# EAGLE board Comms_Cape (EAGLE 7.7.0)
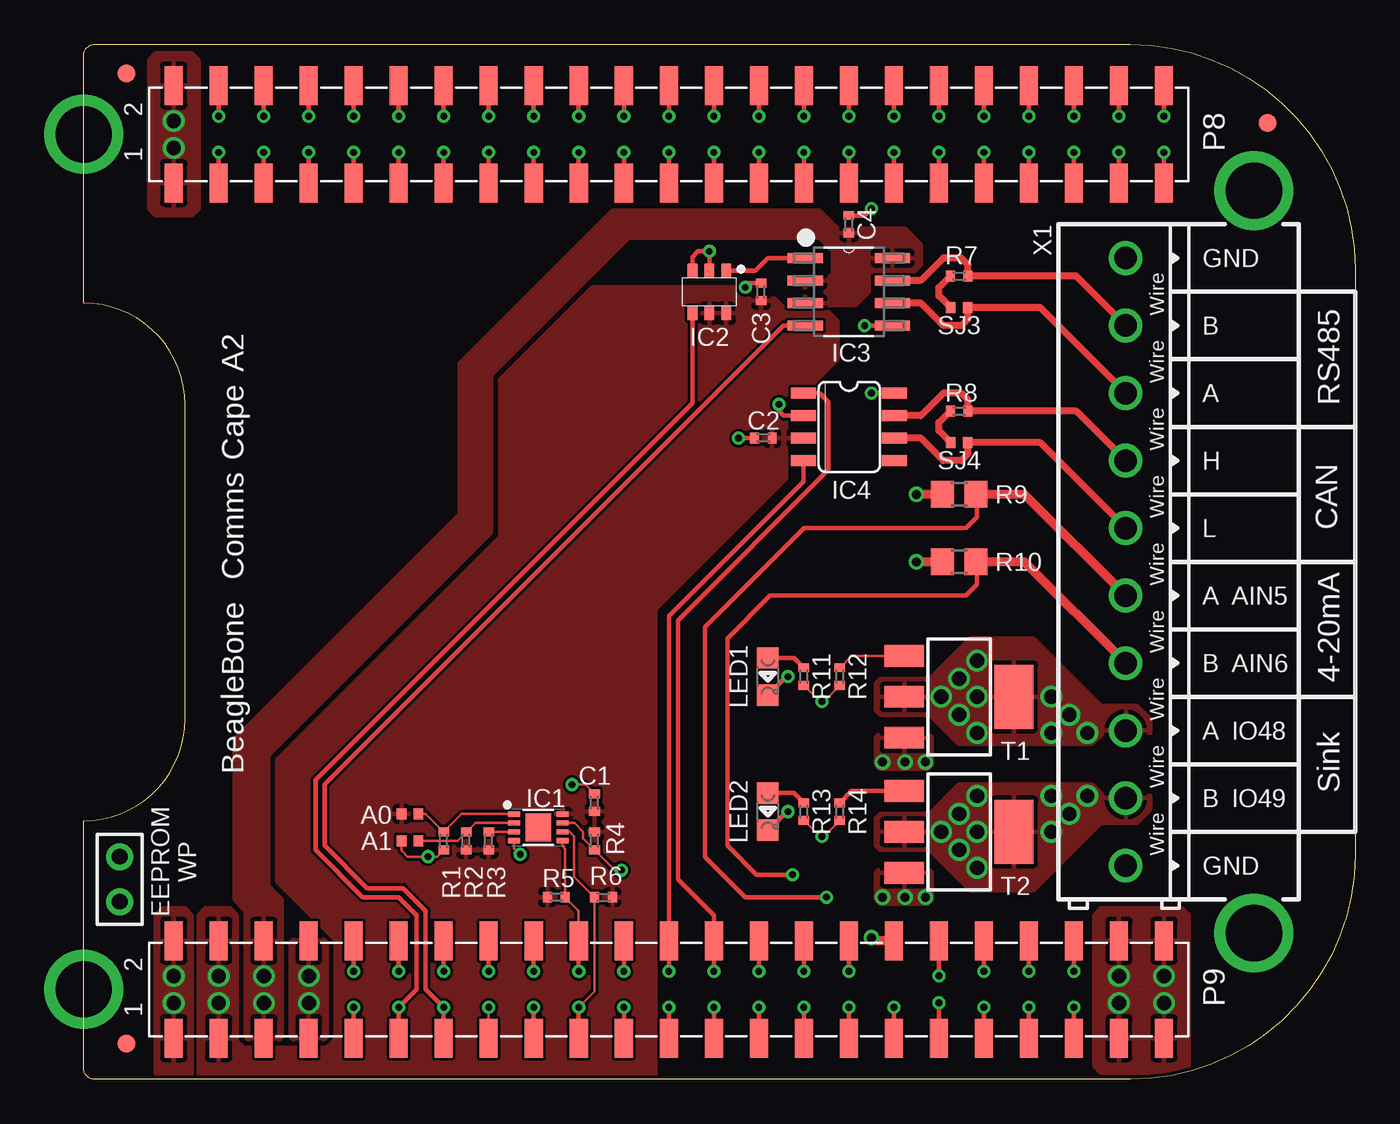
[diagram p0: board, top side]
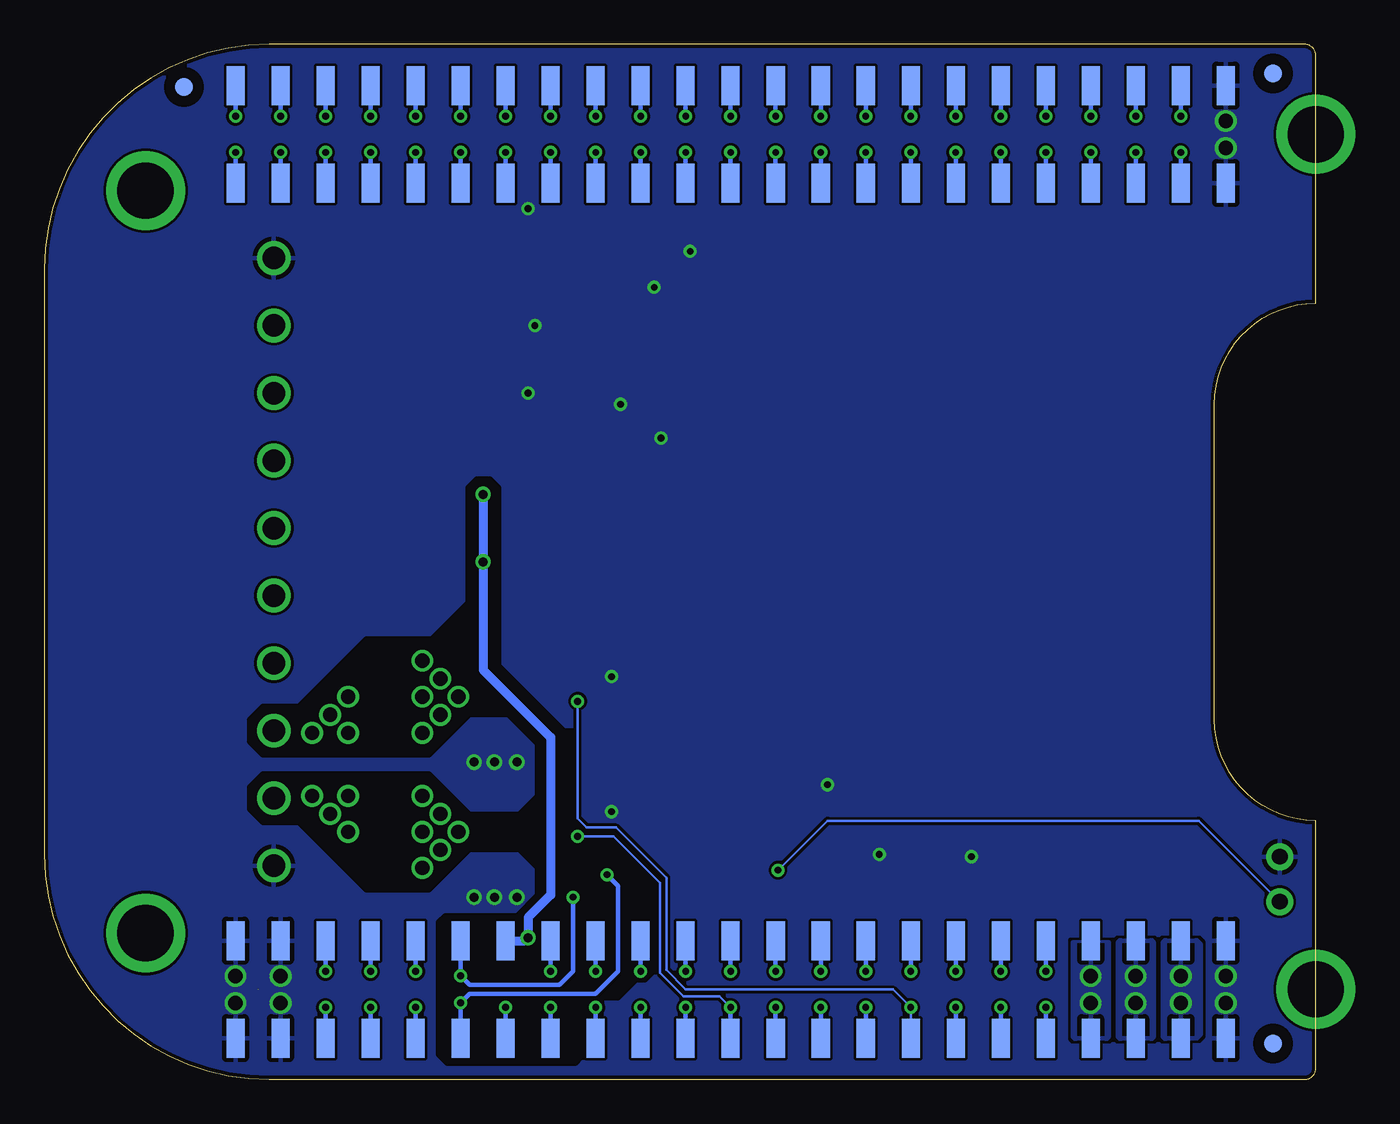
[diagram p1: board, bottom side, seen from below]

Size 71.75 x 58.42 mm. Coordinates in mm from the lower left corner, seen from the top.
Copper layers (1+16): Top 0.035mm / dielectric 1.5mm / Bottom 0.035mm
Design rules "SparkFun-2-layer *": minimum track width 6mil, minimum drill 15mil, track to track 6mil, track to pad 6mil, pad to pad 6mil, via to via 6mil, smd to smd 6mil, copper to edge 8mil, drill to drill 8mil, minimum pad ring 12mil, minimum via ring 7mil, stop-mask expansion 4mil, vias tented up to drill 32mil, thermal gap 10mil
tRestrict: area 40.5,44.3 to 40.9,44.6
bRestrict: 52 lines

## Footprints (pad centres in the part's own frame; a part is rotated, then mirrored left to right if it is on the bottom)
BEAGLEBONE.CAPE.TOP/BOTTOM-PADS = smd 1.02 x 2.2 bottom: B8.1 5.08,50.59; B8.2 5.08,56.09; B8.3 7.62,50.59; B8.4 7.62,56.09; B8.5 10.16,50.59; B8.6 10.16,56.09; B8.7 12.7,50.59; B8.8 12.7,56.09; B8.9 15.24,50.59; B8.10 15.24,56.09; B8.11 17.78,50.59; B8.12 17.78,56.09; B8.13 20.32,50.59; B8.14 20.32,56.09; B8.15 22.86,50.59; B8.16 22.86,56.09; B8.17 25.4,50.59; B8.18 25.4,56.09; B8.19 27.94,50.59; B8.20 27.94,56.09; B8.21 30.48,50.59; B8.22 30.48,56.09; B8.23 33.02,50.59; B8.24 33.02,56.09; B8.25 35.56,50.59; B8.26 35.56,56.09; B8.27 38.1,50.59; B8.28 38.1,56.09; B8.29 40.64,50.59; B8.30 40.64,56.09; B8.31 43.18,50.59; B8.32 43.18,56.09; B8.33 45.72,50.59; B8.34 45.72,56.09; B8.35 48.26,50.59; B8.36 48.26,56.09; B8.37 50.8,50.59; B8.38 50.8,56.09; B8.39 53.34,50.59; B8.40 53.34,56.09; B8.41 55.88,50.59; B8.42 55.88,56.09; B8.43 58.42,50.59; B8.44 58.42,56.09; B8.45 60.96,50.59; B8.46 60.96,56.09; B9.1 5.08,2.33; B9.2 5.08,7.83; B9.3 7.62,2.33; B9.4 7.62,7.83; B9.5 10.16,2.33; B9.6 10.16,7.83; B9.7 12.7,2.33; B9.8 12.7,7.83; B9.9 15.24,2.33; B9.10 15.24,7.83; B9.11 17.78,2.33; B9.12 17.78,7.83; B9.13 20.32,2.33; B9.14 20.32,7.83; B9.15 22.86,2.33; B9.16 22.86,7.83; B9.17 25.4,2.33; B9.18 25.4,7.83; B9.19 27.94,2.33; B9.20 27.94,7.83; B9.21 30.48,2.33; B9.22 30.48,7.83; B9.23 33.02,2.33; B9.24 33.02,7.83; B9.25 35.56,2.33; B9.26 35.56,7.83; B9.27 38.1,2.33; B9.28 38.1,7.83; B9.29 40.64,2.33; B9.30 40.64,7.83; B9.31 43.18,2.33; B9.32 43.18,7.83; B9.33 45.72,2.33; B9.34 45.72,7.83; B9.35 48.26,2.33; B9.36 48.26,7.83; B9.37 50.8,2.33; B9.38 50.8,7.83; B9.39 53.34,2.33; B9.40 53.34,7.83; B9.41 55.88,2.33; B9.42 55.88,7.83; B9.43 58.42,2.33; B9.44 58.42,7.83; B9.45 60.96,2.33; B9.46 60.96,7.83 | drill 3.175 pad 4.445: MH.1 0,5.08; MH.2 66.04,8.255; MH.3 66.04,50.165; MH.4 0,53.34 | smd 1.02 x 2.2: T8.1 5.08,50.59; T8.2 5.08,56.09; T8.3 7.62,50.59; T8.4 7.62,56.09; T8.5 10.16,50.59; T8.6 10.16,56.09; T8.7 12.7,50.59; T8.8 12.7,56.09; T8.9 15.24,50.59; T8.10 15.24,56.09; T8.11 17.78,50.59; T8.12 17.78,56.09; T8.13 20.32,50.59; T8.14 20.32,56.09; T8.15 22.86,50.59; T8.16 22.86,56.09; T8.17 25.4,50.59; T8.18 25.4,56.09; T8.19 27.94,50.59; T8.20 27.94,56.09; T8.21 30.48,50.59; T8.22 30.48,56.09; T8.23 33.02,50.59; T8.24 33.02,56.09; T8.25 35.56,50.59; T8.26 35.56,56.09; T8.27 38.1,50.59; T8.28 38.1,56.09; T8.29 40.64,50.59; T8.30 40.64,56.09; T8.31 43.18,50.59; T8.32 43.18,56.09; T8.33 45.72,50.59; T8.34 45.72,56.09; T8.35 48.26,50.59; T8.36 48.26,56.09; T8.37 50.8,50.59; T8.38 50.8,56.09; T8.39 53.34,50.59; T8.40 53.34,56.09; T8.41 55.88,50.59; T8.42 55.88,56.09; T8.43 58.42,50.59; T8.44 58.42,56.09; T8.45 60.96,50.59; T8.46 60.96,56.09; T9.1 5.08,2.33; T9.2 5.08,7.83; T9.3 7.62,2.33; T9.4 7.62,7.83; T9.5 10.16,2.33; T9.6 10.16,7.83; T9.7 12.7,2.33; T9.8 12.7,7.83; T9.9 15.24,2.33; T9.10 15.24,7.83; T9.11 17.78,2.33; T9.12 17.78,7.83; T9.13 20.32,2.33; T9.14 20.32,7.83; T9.15 22.86,2.33; T9.16 22.86,7.83; T9.17 25.4,2.33; T9.18 25.4,7.83; T9.19 27.94,2.33; T9.20 27.94,7.83; T9.21 30.48,2.33; T9.22 30.48,7.83; T9.23 33.02,2.33; T9.24 33.02,7.83; T9.25 35.56,2.33; T9.26 35.56,7.83; T9.27 38.1,2.33; T9.28 38.1,7.83; T9.29 40.64,2.33; T9.30 40.64,7.83; T9.31 43.18,2.33; T9.32 43.18,7.83; T9.33 45.72,2.33; T9.34 45.72,7.83; T9.35 48.26,2.33; T9.36 48.26,7.83; T9.37 50.8,2.33; T9.38 50.8,7.83; T9.39 53.34,2.33; T9.40 53.34,7.83; T9.41 55.88,2.33; T9.42 55.88,7.83; T9.43 58.42,2.33; T9.44 58.42,7.83; T9.45 60.96,2.33; T9.46 60.96,7.83
0402 = smd 0.5 x 0.6: 1 -0.5,0; 2 0.5,0
FIDUCIAL_40MIL = smd 1.016 x 1.016: P$1 0,0
UDFN8,2X3(ON-SEMI) = smd 0.3 x 0.68: 1 0.75,1.36; 2 0.25,1.36; 3 -0.25,1.36; 4 -0.75,1.36; 5 -0.75,-1.36; 6 -0.25,-1.36; 7 0.25,-1.36; 8 0.75,-1.36 | smd 1.56 x 1.45: P$1 0,0
SOT-23-6 = smd 0.55 x 0.8: GND 0,-1.2; IN0 0.95,-1.2; IN1 -0.95,-1.2; IN2 -0.95,1.2; VCC 0,1.2; Y 0.95,1.2
SOIC8 = smd 1.981 x 0.559: 1 -2.464,1.905; 2 -2.464,0.635; 3 -2.464,-0.635; 4 -2.464,-1.905; 5 2.464,-1.905; 6 2.464,-0.635; 7 2.464,0.635; 8 2.464,1.905
SO8 = smd 0.635 x 1.397: 1 -1.905,-2.565; 2 -0.635,-2.565; 3 0.635,-2.565; 4 1.905,-2.565; 5 1.905,2.565; 6 0.635,2.565; 7 -0.635,2.565; 8 -1.905,2.565
JUMPER-(X2) = drill 0.889 pad 1.524: 1 -1.27,0; 2 1.27,0
0805-LED = smd 1.2 x 1.2: A 0,1.05; K 0,-1.05
0805 = smd 1.3 x 1.5: 1 -0.95,0; 2 0.95,0
SOLDER.JOINT(0402) = smd 0.55 x 0.6: 1 -0.475,0; 2 0.475,0
SOT223 = smd 1.219 x 2.235: 1 -2.311,-3.099; 2 0,-3.099; 3 2.311,-3.099 | smd 3.6 x 2.2: 4 0,3.099
TERMINAL.BLOCK-10TERM-150MIL.PITCH = drill 1.27 pad 1.905: 1 -17.145,0; 2 -13.335,0; 3 -9.525,0; 4 -5.715,0; 5 -1.905,0; 6 1.905,0; 7 5.715,0; 8 9.525,0; 9 13.335,0; 10 17.145,0

## Placement (x,y rotation side)
BB.CAPE2  BEAGLEBONE.CAPE.TOP/BOTTOM-PADS  [BEAGLEBONE.CAPE.TOP/BOTTOM-PADS]  0,0 0 top
C1  .1uF  [0402]  28.83,15.62 90 top
C2  .1uF  [0402]  38.35,36.2 180 top
C3  .1uF  [0402]  38.23,44.45 90 top
C4  .1uF  [0402]  43.18,48.26 90 top
FUD1  FIDUCIAL  [FIDUCIAL_40MIL]  2.41,2.03 0 top
FUD2  FIDUCIAL  [FIDUCIAL_40MIL]  66.8,53.98 0 top
FUD3  FIDUCIAL  [FIDUCIAL_40MIL]  2.41,56.77 0 top
FUD4  FIDUCIAL  [FIDUCIAL_40MIL]  2.41,2.03 0 bottom
FUD5  FIDUCIAL  [FIDUCIAL_40MIL]  63.88,56.01 0 bottom
FUD6  FIDUCIAL  [FIDUCIAL_40MIL]  2.41,56.77 0 bottom
IC1  [UDFN8,2X3(ON-SEMI)]  25.65,14.22 90 top
IC2  74LVC1G57  [SOT-23-6]  35.31,44.45 180 top
IC3  MAX13487EESA  [SOIC8]  43.18,44.45 0 top
IC4  SN65HVD230  [SO8]  43.18,36.83 270 top
JMP1  JUMPER-(X2)  [JUMPER-(X2)]  2.03,11.3 90 top
LED1  [0805-LED]  38.61,22.73 0 top
LED2  [0805-LED]  38.61,15.11 0 top
R1  1k  [0402]  20.32,13.46 90 top
R2  1k  [0402]  21.59,13.46 90 top
R3  1k  [0402]  22.86,13.46 90 top
R4  1k  [0402]  28.83,13.46 90 top
R5  DNP(2.2k)  [0402]  26.67,10.29 180 top
R6  DNP(2.2k)  [0402]  29.34,10.29 0 top
R7  120  [0402]  49.4,45.34 0 top
R8  120  [0402]  49.4,37.72 0 top
R9  75 .125W  [0805]  49.4,33.02 0 top
R10  75 .125W  [0805]  49.4,29.21 0 top
R11  1k  [0402]  40.64,22.73 90 top
R12  330  [0402]  42.67,22.73 90 top
R13  1k  [0402]  40.64,15.11 90 top
R14  330  [0402]  42.67,15.11 90 top
SJ1  [SOLDER.JOINT(0402)]  18.41,14.99 0 top
SJ2  [SOLDER.JOINT(0402)]  18.41,13.46 0 top
SJ3  [SOLDER.JOINT(0402)]  49.4,43.56 0 top
SJ4  [SOLDER.JOINT(0402)]  49.4,35.94 0 top
T1  PBSS4350Z 50V 3A  [SOT223]  49.4,21.59 270 top
T2  PBSS4350Z 50V 3A  [SOT223]  49.4,13.97 270 top
X1  [TERMINAL.BLOCK-10TERM-150MIL.PITCH]  58.8,29.21 270 top

## Library data of the parts
BB.CAPE2 = GHI-Solutions
C1-C4 LED1 LED2 R1-R14 = GHI-BasicComponents
FUD1-FUD6 IC4 = GHI
IC1 = GHI-IC
IC2 = GHI2
IC3 = GHI3
JMP1 = GHI-Headers
SJ1-SJ4 = GHI-Miscellaneous
T1 T2 = GHI-Transistors
X1 = GHI-Connectors

## Nets
4-20MA.LOOP.A: BB.CAPE2.B9.36 BB.CAPE2.T9.36 R9.2 X1.6
4-20MA.LOOP.B: BB.CAPE2.B9.35 BB.CAPE2.T9.35 R10.2 X1.7
+5V [power]: BB.CAPE2.B9.5 BB.CAPE2.B9.6 BB.CAPE2.T9.5 BB.CAPE2.T9.6 C4.1 IC3.2 IC3.3 IC3.8
A0: IC1.1 R1.2 SJ1.2
A1: IC1.2 R2.2 SJ2.2
A2: IC1.3 R3.2
AGND: BB.CAPE2.B9.34 BB.CAPE2.T9.34 R9.1 R10.1
CAN.H: IC4.7 R8.2 X1.4
CAN.L: IC4.6 SJ4.2 X1.5
CAN.RD: BB.CAPE2.B9.24 BB.CAPE2.T9.24 IC4.4
CAN.TD: BB.CAPE2.B9.26 BB.CAPE2.T9.26 IC4.1
GND: BB.CAPE2.B8.1 BB.CAPE2.B8.2 BB.CAPE2.B9.1 BB.CAPE2.B9.2 BB.CAPE2.B9.43 BB.CAPE2.B9.44 BB.CAPE2.B9.45 BB.CAPE2.B9.46 BB.CAPE2.T8.1 BB.CAPE2.T8.2 BB.CAPE2.T9.1 BB.CAPE2.T9.2 BB.CAPE2.T9.43 BB.CAPE2.T9.44 BB.CAPE2.T9.45 BB.CAPE2.T9.46 C1.2 C2.2 C3.2 C4.2 IC1.4 IC2.GND IC2.IN0 IC3.5 IC4.2 IC4.8 JMP1.2 LED1.K LED2.K R1.1 SJ2.1 T1.3 T2.3 X1.1 X1.10
N$4: R8.1 SJ4.1
N$5: R7.1 SJ3.1
N$7: LED1.A R11.2
N$8: LED2.A R13.2
P8.3: BB.CAPE2.B8.3 BB.CAPE2.T8.3
P8.4: BB.CAPE2.B8.4 BB.CAPE2.T8.4
P8.5: BB.CAPE2.B8.5 BB.CAPE2.T8.5
P8.6: BB.CAPE2.B8.6 BB.CAPE2.T8.6
P8.7: BB.CAPE2.B8.7 BB.CAPE2.T8.7
P8.8: BB.CAPE2.B8.8 BB.CAPE2.T8.8
P8.9: BB.CAPE2.B8.9 BB.CAPE2.T8.9
P8.10: BB.CAPE2.B8.10 BB.CAPE2.T8.10
P8.11: BB.CAPE2.B8.11 BB.CAPE2.T8.11
P8.12: BB.CAPE2.B8.12 BB.CAPE2.T8.12
P8.13: BB.CAPE2.B8.13 BB.CAPE2.T8.13
P8.14: BB.CAPE2.B8.14 BB.CAPE2.T8.14
P8.15: BB.CAPE2.B8.15 BB.CAPE2.T8.15
P8.16: BB.CAPE2.B8.16 BB.CAPE2.T8.16
P8.17: BB.CAPE2.B8.17 BB.CAPE2.T8.17
P8.18: BB.CAPE2.B8.18 BB.CAPE2.T8.18
P8.19: BB.CAPE2.B8.19 BB.CAPE2.T8.19
P8.20: BB.CAPE2.B8.20 BB.CAPE2.T8.20
P8.21: BB.CAPE2.B8.21 BB.CAPE2.T8.21
P8.22: BB.CAPE2.B8.22 BB.CAPE2.T8.22
P8.23: BB.CAPE2.B8.23 BB.CAPE2.T8.23
P8.24: BB.CAPE2.B8.24 BB.CAPE2.T8.24
P8.25: BB.CAPE2.B8.25 BB.CAPE2.T8.25
P8.26: BB.CAPE2.B8.26 BB.CAPE2.T8.26
P8.27: BB.CAPE2.B8.27 BB.CAPE2.T8.27
P8.28: BB.CAPE2.B8.28 BB.CAPE2.T8.28
P8.29: BB.CAPE2.B8.29 BB.CAPE2.T8.29
P8.30: BB.CAPE2.B8.30 BB.CAPE2.T8.30
P8.31: BB.CAPE2.B8.31 BB.CAPE2.T8.31
P8.32: BB.CAPE2.B8.32 BB.CAPE2.T8.32
P8.33: BB.CAPE2.B8.33 BB.CAPE2.T8.33
P8.34: BB.CAPE2.B8.34 BB.CAPE2.T8.34
P8.35: BB.CAPE2.B8.35 BB.CAPE2.T8.35
P8.36: BB.CAPE2.B8.36 BB.CAPE2.T8.36
P8.37: BB.CAPE2.B8.37 BB.CAPE2.T8.37
P8.38: BB.CAPE2.B8.38 BB.CAPE2.T8.38
P8.39: BB.CAPE2.B8.39 BB.CAPE2.T8.39
P8.40: BB.CAPE2.B8.40 BB.CAPE2.T8.40
P8.41: BB.CAPE2.B8.41 BB.CAPE2.T8.41
P8.42: BB.CAPE2.B8.42 BB.CAPE2.T8.42
P8.43: BB.CAPE2.B8.43 BB.CAPE2.T8.43
P8.44: BB.CAPE2.B8.44 BB.CAPE2.T8.44
P8.45: BB.CAPE2.B8.45 BB.CAPE2.T8.45
P8.46: BB.CAPE2.B8.46 BB.CAPE2.T8.46
P9.9: BB.CAPE2.B9.9 BB.CAPE2.T9.9
P9.10: BB.CAPE2.B9.10 BB.CAPE2.T9.10
P9.12: BB.CAPE2.B9.12 BB.CAPE2.T9.12
P9.14: BB.CAPE2.B9.14 BB.CAPE2.T9.14
P9.16: BB.CAPE2.B9.16 BB.CAPE2.T9.16
P9.17: BB.CAPE2.B9.17 BB.CAPE2.T9.17
P9.18: BB.CAPE2.B9.18 BB.CAPE2.T9.18
P9.21: BB.CAPE2.B9.21 BB.CAPE2.T9.21
P9.22: BB.CAPE2.B9.22 BB.CAPE2.T9.22
P9.25: BB.CAPE2.B9.25 BB.CAPE2.T9.25
P9.27: BB.CAPE2.B9.27 BB.CAPE2.T9.27
P9.28: BB.CAPE2.B9.28 BB.CAPE2.T9.28
P9.29: BB.CAPE2.B9.29 BB.CAPE2.T9.29
P9.30: BB.CAPE2.B9.30 BB.CAPE2.T9.30
P9.31: BB.CAPE2.B9.31 BB.CAPE2.T9.31
P9.32: BB.CAPE2.B9.32 BB.CAPE2.T9.32
P9.33: BB.CAPE2.B9.33 BB.CAPE2.T9.33
P9.37: BB.CAPE2.B9.37 BB.CAPE2.T9.37
P9.38: BB.CAPE2.B9.38 BB.CAPE2.T9.38
P9.39: BB.CAPE2.B9.39 BB.CAPE2.T9.39
P9.40: BB.CAPE2.B9.40 BB.CAPE2.T9.40
P9.41: BB.CAPE2.B9.41 BB.CAPE2.T9.41
P9.42: BB.CAPE2.B9.42 BB.CAPE2.T9.42
RS485.A: IC3.6 SJ3.2 X1.3
RS485.B: IC3.7 R7.2 X1.2
RS485.RX: BB.CAPE2.B9.11 BB.CAPE2.T9.11 IC2.Y
RS485.RX.5V: IC2.IN1 IC3.1
RS485.TX: BB.CAPE2.B9.13 BB.CAPE2.T9.13 IC3.4
SCL: BB.CAPE2.B9.19 BB.CAPE2.T9.19 IC1.6 R6.1
SDA: BB.CAPE2.B9.20 BB.CAPE2.T9.20 IC1.5 R5.1
SINK.A: BB.CAPE2.B9.15 BB.CAPE2.T9.15 R11.1 R12.1
SINK.A-BASE: R12.2 T1.1
SINK.A-TB: T1.2 T1.4 X1.8
SINK.B: BB.CAPE2.B9.23 BB.CAPE2.T9.23 R13.1 R14.1
SINK.B-BASE: R14.2 T2.1
SINK.B-TB: T2.2 T2.4 X1.9
SYS.VOUT: BB.CAPE2.B9.7 BB.CAPE2.B9.8 BB.CAPE2.T9.7 BB.CAPE2.T9.8
VCC: BB.CAPE2.B9.3 BB.CAPE2.B9.4 BB.CAPE2.T9.3 BB.CAPE2.T9.4 C1.1 C2.1 C3.1 IC1.8 IC2.IN2 IC2.VCC IC4.3 R2.1 R3.1 R4.2 R5.2 R6.2 SJ1.1
WP: IC1.7 JMP1.1 R4.1

## Tracks (layer width: path | path; a pad name or v marks a point on that pad's centre or on a via)
4-20MA.LOOP.A  (via drill 0.38 pad 0.18)
  Top 0.254: 50.42,33.02 50.42,31.75 49.78,31.11 40.64,31.11 35.05,25.53 35.05,12.57 37.34,10.29 v41.91,10.29 | v48.26,5.84 BB.CAPE2.B9.36
  Top 0.508: X1.6 53.09,33.02 50.42,33.02
  Top 0.813: 50.42,33.02 R9.2
  Bottom 0.254: BB.CAPE2.B9.36 v48.26,5.84 47.75,5.33 42.67,5.33 41.91,6.1 41.91,6.48 v41.91,10.29
4-20MA.LOOP.B  (via drill 0.38 pad 0.18)
  Top 0.254: 50.42,29.21 50.42,27.94 49.78,27.3 38.73,27.3 36.32,24.89 36.32,13.21 37.97,11.56 v40.01,11.56 | v48.26,4.32 BB.CAPE2.T9.35
  Top 0.508: X1.7 53.09,29.21 50.42,29.21
  Top 1.27: 50.42,29.21 R10.2
  Bottom 0.254: v40.01,11.56 39.37,10.92 39.37,6.1 40.64,4.83 47.75,4.83 v48.26,4.32 BB.CAPE2.T9.35
+5V  (via drill 0.81 pad 0.18)
  other vias: 10.16,4.32 10.16,5.84
  pour Bottom: 10.79,8.13 9.53,8.13 9.14,7.75 9.14,2.41 9.53,2.03 10.79,2.03 11.18,2.41 11.18,7.75
  pour Top: 9.14,9.53 9.14,2.41 9.53,2.03 10.79,2.03 11.18,2.41 11.18,10.16 10.41,10.92 10.41,18.29 22.99,30.86 22.99,39.75 30.73,47.5 41.53,47.5 42.29,46.74 42.29,45.47 42.04,45.21 40.51,45.21 40.26,44.96 40.26,43.94 40.51,43.69 43.56,43.69 44.32,44.45 44.32,45.47 44.45,45.59 46.86,45.59 47.24,45.97 47.24,47.12 46.35,48.01 42.55,48.01 41.53,49.02 29.84,49.02 21.21,40.39 21.21,31.88 8.51,19.18 8.51,10.16
A0
  Top 0.152: IC1.1 21.33,14.97 R1.2 19.3,14.99 SJ1.2
A1
  Top 0.152: IC1.2 22.1,14.47 R2.2 21.09,13.46 SJ2.2
A2
  Top 0.152: IC1.3 22.87,13.97 R3.2
AGND  (via drill 0.51 pad 0.18)
  Top 0.508: R9.1 v46.99,33.02 | R10.1 v46.99,29.21 | BB.CAPE2.T9.34 44.62,7.83 v44.45,8
  Bottom 0.508: v46.99,33.02 v46.99,29.21 46.99,23.11 43.18,19.3 43.18,10.41 44.45,9.14 v44.45,8 44.62,7.83 BB.CAPE2.T9.34
CAN.H
  Top 0.406: X1.4 56.01,37.72 R8.2 49.9,38.36 49.53,38.73 48.51,38.73 47.24,37.47 IC4.7
CAN.L
  Top 0.406: X1.5 53.98,35.94 SJ4.2 49.88,35.27 49.53,34.92 48.51,34.92 47.24,36.2 IC4.6
CAN.RD  (via drill 0.38 pad 0.18)
  Top 0.254: IC4.4 40.62,33.76 33.02,26.16 BB.CAPE2.T9.24 v33.02,6.1
  Bottom 0.254: v33.02,6.1 BB.CAPE2.T9.24
CAN.TD  (via drill 0.38 pad 0.18)
  Top 0.254: IC4.1 41.53,38.73 42.04,38.23 42.04,34.42 33.53,25.91 33.53,11.3 35.56,9.27 BB.CAPE2.T9.26 v35.56,6.1
  Bottom 0.254: v35.56,6.1 BB.CAPE2.T9.26
GND  (via drill 0.38 pad 0.18, 0.51 pad 0.18, 0.81 pad 0.18)  (1 unrouted)
  Top 0.152: IC1.4 24.29,13.04 v24.64,12.7 | C1.2 28.31,16.64 v27.56,16.64 | SJ2.1 17.94,12.92 18.29,12.57 v19.43,12.57 19.93,12.57 R1.1
  Top 0.254: LED2.K 39.66,15.11 v39.75,15.11 | LED1.K 39.66,22.73 v39.75,22.73 | IC4.8 v44.45,38.73 | C3.2 37.58,44.95 v37.34,44.7 | IC2.GND v35.31,46.74 34.67,46.74 34.36,46.42 IC2.IN0 | C4.2 44.06,48.76 v44.45,49.15 | IC3.5 v44.07,42.55 | C2.2 v36.96,36.2 | IC4.2 39.5,37.47 39.24,37.72 v39.24,38.1
  other vias: 58.42,4.32 60.96,4.32 5.08,52.58 5.08,54.1 58.42,5.84 60.96,5.84 5.08,5.84 5.08,4.32 45.09,17.91 46.35,17.91 47.5,17.91 45.09,10.29 46.35,10.29 47.5,10.29
  pour Bottom (rank 2): 72.39,59.05 -0.64,59.05 -0.64,-0.64 72.39,-0.64
  pour Top: 61.98,9.65 57.4,9.65 57.02,9.27 57.02,0.76 57.4,0.38 61.98,0.38 62.36,0.76 62.36,9.27
  pour Top: 4.06,57.91 6.1,57.91 6.48,57.53 6.48,49.15 6.1,48.77 4.06,48.77 3.68,49.15 3.68,57.53
  pour Top: 5.71,9.65 4.45,9.65 4.06,9.27 4.06,-0.13 6.1,-0.13 6.1,9.27
  pour Top: 47.62,19.56 44.96,19.56 44.7,19.3 44.7,17.78 44.96,17.53 47.62,17.53 47.88,17.78 47.88,19.3
  pour Top: 47.62,11.94 44.96,11.94 44.7,11.68 44.7,10.16 44.96,9.91 47.62,9.91 47.88,10.16 47.88,11.68
N$4
  Top 0.406: SJ4.1 48.26,36.61 48.26,37.08 R8.1
N$5
  Top 0.406: SJ3.1 48.26,44.23 48.26,44.7 R7.1
N$7
  Top 0.254: LED1.A 40.09,23.78 R11.2
N$8
  Top 0.254: LED2.A 40.09,16.16 R13.2
P8.3  (via drill 0.38 pad 0.18)
  Top 0.254: BB.CAPE2.T8.3 v7.62,52.32
  Bottom 0.254: v7.62,52.32 BB.CAPE2.T8.3
P8.4  (via drill 0.38 pad 0.18)
  Top 0.254: v7.62,54.36 BB.CAPE2.B8.4
  Bottom 0.254: BB.CAPE2.B8.4 v7.62,54.36
P8.5  (via drill 0.38 pad 0.18)
  Top 0.254: v10.16,52.32 BB.CAPE2.B8.5
  Bottom 0.254: BB.CAPE2.B8.5 v10.16,52.32
P8.6  (via drill 0.38 pad 0.18)
  Top 0.254: BB.CAPE2.B8.6 v10.16,54.36
  Bottom 0.254: v10.16,54.36 BB.CAPE2.B8.6
P8.7  (via drill 0.38 pad 0.18)
  Top 0.254: BB.CAPE2.T8.7 v12.7,52.32
  Bottom 0.254: v12.7,52.32 BB.CAPE2.T8.7
P8.8  (via drill 0.38 pad 0.18)
  Top 0.254: v12.7,54.36 BB.CAPE2.T8.8
  Bottom 0.254: BB.CAPE2.T8.8 v12.7,54.36
P8.9  (via drill 0.38 pad 0.18)
  Top 0.254: v15.24,52.32 BB.CAPE2.T8.9
  Bottom 0.254: BB.CAPE2.T8.9 v15.24,52.32
P8.10  (via drill 0.38 pad 0.18)
  Top 0.254: BB.CAPE2.B8.10 v15.24,54.36
  Bottom 0.254: v15.24,54.36 BB.CAPE2.B8.10
P8.11  (via drill 0.38 pad 0.18)
  Top 0.254: BB.CAPE2.T8.11 v17.78,52.32
  Bottom 0.254: v17.78,52.32 BB.CAPE2.T8.11
P8.12  (via drill 0.38 pad 0.18)
  Top 0.254: v17.78,54.36 BB.CAPE2.B8.12
  Bottom 0.254: BB.CAPE2.B8.12 v17.78,54.36
P8.13  (via drill 0.38 pad 0.18)
  Top 0.254: v20.32,52.32 BB.CAPE2.T8.13
  Bottom 0.254: BB.CAPE2.T8.13 v20.32,52.32
P8.14  (via drill 0.38 pad 0.18)
  Top 0.254: BB.CAPE2.T8.14 v20.32,54.36
  Bottom 0.254: v20.32,54.36 BB.CAPE2.T8.14
P8.15  (via drill 0.38 pad 0.18)
  Top 0.254: BB.CAPE2.T8.15 v22.86,52.32
  Bottom 0.254: v22.86,52.32 BB.CAPE2.T8.15
P8.16  (via drill 0.38 pad 0.18)
  Top 0.254: v22.86,54.36 BB.CAPE2.B8.16
  Bottom 0.254: BB.CAPE2.B8.16 v22.86,54.36
P8.17  (via drill 0.38 pad 0.18)
  Top 0.254: v25.4,52.32 BB.CAPE2.T8.17
  Bottom 0.254: BB.CAPE2.T8.17 v25.4,52.32
P8.18  (via drill 0.38 pad 0.18)
  Top 0.254: BB.CAPE2.B8.18 v25.4,54.36
  Bottom 0.254: v25.4,54.36 BB.CAPE2.B8.18
P8.19  (via drill 0.38 pad 0.18)
  Top 0.254: BB.CAPE2.B8.19 v27.94,52.32
  Bottom 0.254: v27.94,52.32 BB.CAPE2.B8.19
P8.20  (via drill 0.38 pad 0.18)
  Top 0.254: v27.94,54.36 BB.CAPE2.T8.20
  Bottom 0.254: BB.CAPE2.T8.20 v27.94,54.36
P8.21  (via drill 0.38 pad 0.18)
  Top 0.254: v30.48,52.32 BB.CAPE2.B8.21
  Bottom 0.254: BB.CAPE2.B8.21 v30.48,52.32
P8.22  (via drill 0.38 pad 0.18)
  Top 0.254: BB.CAPE2.T8.22 v30.48,54.36
  Bottom 0.254: v30.48,54.36 BB.CAPE2.T8.22
P8.23  (via drill 0.38 pad 0.18)
  Top 0.254: BB.CAPE2.B8.23 v33.02,52.32
  Bottom 0.254: v33.02,52.32 BB.CAPE2.B8.23
P8.24  (via drill 0.38 pad 0.18)
  Top 0.254: v33.02,54.36 BB.CAPE2.T8.24
  Bottom 0.254: BB.CAPE2.T8.24 v33.02,54.36
P8.25  (via drill 0.38 pad 0.18)
  Top 0.254: v35.56,52.32 BB.CAPE2.B8.25
  Bottom 0.254: BB.CAPE2.B8.25 v35.56,52.32
P8.26  (via drill 0.38 pad 0.18)
  Top 0.254: BB.CAPE2.B8.26 v35.56,54.36
  Bottom 0.254: v35.56,54.36 BB.CAPE2.B8.26
P8.27  (via drill 0.38 pad 0.18)
  Top 0.254: BB.CAPE2.B8.27 v38.1,52.32
  Bottom 0.254: v38.1,52.32 BB.CAPE2.B8.27
P8.28  (via drill 0.38 pad 0.18)
  Top 0.254: v38.1,54.36 BB.CAPE2.T8.28
  Bottom 0.254: BB.CAPE2.T8.28 v38.1,54.36
P8.29  (via drill 0.38 pad 0.18)
  Top 0.254: v40.64,52.32 BB.CAPE2.B8.29
  Bottom 0.254: BB.CAPE2.B8.29 v40.64,52.32
P8.30  (via drill 0.38 pad 0.18)
  Top 0.254: BB.CAPE2.B8.30 v40.64,54.36
  Bottom 0.254: v40.64,54.36 BB.CAPE2.B8.30
P8.31  (via drill 0.38 pad 0.18)
  Top 0.254: BB.CAPE2.B8.31 v43.18,52.32
  Bottom 0.254: v43.18,52.32 BB.CAPE2.B8.31
P8.32  (via drill 0.38 pad 0.18)
  Top 0.254: BB.CAPE2.T8.32 v43.18,54.36
  Bottom 0.254: v43.18,54.36 BB.CAPE2.T8.32
P8.33  (via drill 0.38 pad 0.18)
  Top 0.254: v45.72,52.32 BB.CAPE2.T8.33
  Bottom 0.254: BB.CAPE2.T8.33 v45.72,52.32
P8.34  (via drill 0.38 pad 0.18)
  Top 0.254: v45.72,54.36 BB.CAPE2.B8.34
  Bottom 0.254: BB.CAPE2.B8.34 v45.72,54.36
P8.35  (via drill 0.38 pad 0.18)
  Top 0.254: BB.CAPE2.T8.35 v48.26,52.32
  Bottom 0.254: v48.26,52.32 BB.CAPE2.T8.35
P8.36  (via drill 0.38 pad 0.18)
  Top 0.254: BB.CAPE2.T8.36 v48.26,54.36
  Bottom 0.254: v48.26,54.36 BB.CAPE2.T8.36
P8.37  (via drill 0.38 pad 0.18)
  Top 0.254: v50.8,52.32 BB.CAPE2.B8.37
  Bottom 0.254: BB.CAPE2.B8.37 v50.8,52.32
P8.38  (via drill 0.38 pad 0.18)
  Top 0.254: v50.8,54.36 BB.CAPE2.B8.38
  Bottom 0.254: BB.CAPE2.B8.38 v50.8,54.36
P8.39  (via drill 0.38 pad 0.18)
  Top 0.254: BB.CAPE2.B8.39 v53.34,52.32
  Bottom 0.254: v53.34,52.32 BB.CAPE2.B8.39
P8.40  (via drill 0.38 pad 0.18)
  Top 0.254: v53.34,54.36 BB.CAPE2.B8.40
  Bottom 0.254: BB.CAPE2.B8.40 v53.34,54.36
P8.41  (via drill 0.38 pad 0.18)
  Top 0.254: v55.88,52.32 BB.CAPE2.T8.41
  Bottom 0.254: BB.CAPE2.T8.41 v55.88,52.32
P8.42  (via drill 0.38 pad 0.18)
  Top 0.254: BB.CAPE2.B8.42 v55.88,54.36
  Bottom 0.254: v55.88,54.36 BB.CAPE2.B8.42
P8.43  (via drill 0.38 pad 0.18)
  Top 0.254: BB.CAPE2.B8.43 v58.42,52.32
  Bottom 0.254: v58.42,52.32 BB.CAPE2.B8.43
P8.44  (via drill 0.38 pad 0.18)
  Top 0.254: BB.CAPE2.T8.44 v58.42,54.36
  Bottom 0.254: v58.42,54.36 BB.CAPE2.T8.44
P8.45  (via drill 0.38 pad 0.18)
  Top 0.254: v60.96,52.32 BB.CAPE2.B8.45
  Bottom 0.254: BB.CAPE2.B8.45 v60.96,52.32
P8.46  (via drill 0.38 pad 0.18)
  Top 0.254: v60.96,54.36 BB.CAPE2.T8.46
  Bottom 0.254: BB.CAPE2.T8.46 v60.96,54.36
P9.9  (via drill 0.38 pad 0.18)
  Top 0.254: v15.24,4.06 BB.CAPE2.B9.9
  Bottom 0.254: BB.CAPE2.B9.9 v15.24,4.06
P9.10  (via drill 0.38 pad 0.18)
  Top 0.254: BB.CAPE2.T9.10 v15.24,6.1
  Bottom 0.254: v15.24,6.1 BB.CAPE2.T9.10
P9.12  (via drill 0.38 pad 0.18)
  Top 0.254: v17.78,6.1 BB.CAPE2.T9.12
  Bottom 0.254: BB.CAPE2.T9.12 v17.78,6.1
P9.14  (via drill 0.38 pad 0.18)
  Top 0.254: BB.CAPE2.T9.14 v20.32,6.1
  Bottom 0.254: v20.32,6.1 BB.CAPE2.T9.14
P9.16  (via drill 0.38 pad 0.18)
  Top 0.254: v22.86,6.1 BB.CAPE2.B9.16
  Bottom 0.254: BB.CAPE2.B9.16 v22.86,6.1
P9.17  (via drill 0.38 pad 0.18)
  Top 0.254: v25.4,4.06 BB.CAPE2.T9.17
  Bottom 0.254: BB.CAPE2.T9.17 v25.4,4.06
P9.18  (via drill 0.38 pad 0.18)
  Top 0.254: BB.CAPE2.B9.18 v25.4,6.1
  Bottom 0.254: v25.4,6.1 BB.CAPE2.B9.18
P9.21  (via drill 0.38 pad 0.18)
  Top 0.254: v30.48,4.06 BB.CAPE2.B9.21
  Bottom 0.254: BB.CAPE2.B9.21 v30.48,4.06
P9.22  (via drill 0.38 pad 0.18)
  Top 0.254: BB.CAPE2.T9.22 v30.48,6.1
  Bottom 0.254: v30.48,6.1 BB.CAPE2.T9.22
P9.25  (via drill 0.38 pad 0.18)
  Top 0.254: v35.56,4.06 BB.CAPE2.T9.25
  Bottom 0.254: BB.CAPE2.T9.25 v35.56,4.06
P9.27  (via drill 0.38 pad 0.18)
  Top 0.254: BB.CAPE2.T9.27 v38.1,4.06
  Bottom 0.254: v38.1,4.06 BB.CAPE2.T9.27
P9.28  (via drill 0.38 pad 0.18)
  Top 0.254: v38.1,6.1 BB.CAPE2.B9.28
  Bottom 0.254: BB.CAPE2.B9.28 v38.1,6.1
P9.29  (via drill 0.38 pad 0.18)
  Top 0.254: BB.CAPE2.B9.29 v40.64,4.06
  Bottom 0.254: v40.64,4.06 BB.CAPE2.B9.29
P9.30  (via drill 0.38 pad 0.18)
  Top 0.254: BB.CAPE2.T9.30 v40.64,6.1
  Bottom 0.254: v40.64,6.1 BB.CAPE2.T9.30
P9.31  (via drill 0.38 pad 0.18)
  Top 0.254: BB.CAPE2.T9.31 v43.18,4.06
  Bottom 0.254: v43.18,4.06 BB.CAPE2.T9.31
P9.32  (via drill 0.38 pad 0.18)
  Top 0.254: v43.18,6.1 BB.CAPE2.B9.32
  Bottom 0.254: BB.CAPE2.B9.32 v43.18,6.1
P9.33  (via drill 0.38 pad 0.18)
  Top 0.254: v45.72,4.06 BB.CAPE2.T9.33
  Bottom 0.254: BB.CAPE2.T9.33 v45.72,4.06
P9.37  (via drill 0.38 pad 0.18)
  Top 0.254: v50.8,4.06 BB.CAPE2.T9.37
  Bottom 0.254: BB.CAPE2.T9.37 v50.8,4.06
P9.38  (via drill 0.38 pad 0.18)
  Top 0.254: BB.CAPE2.B9.38 v50.8,6.1
  Bottom 0.254: v50.8,6.1 BB.CAPE2.B9.38
P9.39  (via drill 0.38 pad 0.18)
  Top 0.254: BB.CAPE2.B9.39 v53.34,4.06
  Bottom 0.254: v53.34,4.06 BB.CAPE2.B9.39
P9.40  (via drill 0.38 pad 0.18)
  Top 0.254: v53.34,6.1 BB.CAPE2.T9.40
  Bottom 0.254: BB.CAPE2.T9.40 v53.34,6.1
P9.41  (via drill 0.38 pad 0.18)
  Top 0.254: v55.88,4.06 BB.CAPE2.B9.41
  Bottom 0.254: BB.CAPE2.B9.41 v55.88,4.06
P9.42  (via drill 0.38 pad 0.18)
  Top 0.254: BB.CAPE2.T9.42 v55.88,6.1
  Bottom 0.254: v55.88,6.1 BB.CAPE2.T9.42
RS485.A
  Top 0.406: X1.3 53.98,43.56 SJ3.2 49.88,42.89 49.53,42.55 48.51,42.55 47.24,43.81 IC3.6
RS485.B
  Top 0.406: X1.2 56.01,45.34 R7.2 49.9,45.98 49.53,46.35 48.51,46.35 47.24,45.09 IC3.7
RS485.RX  (via drill 0.38 pad 0.18)
  Top 0.254: BB.CAPE2.T9.11 v17.78,4.06 18.8,5.08 18.8,9.27 17.78,10.29 15.75,10.29 13.08,12.95 13.08,16.89 34.36,38.17 IC2.Y
  Bottom 0.254: v17.78,4.06 BB.CAPE2.T9.11
RS485.RX.5V
  Top 0.254: IC3.1 38.61,46.35 37.9,45.65 IC2.IN1
RS485.TX  (via drill 0.38 pad 0.18)
  Top 0.254: BB.CAPE2.T9.13 v20.32,4.06 19.3,5.08 19.3,9.53 18.03,10.79 16,10.79 13.59,13.21 13.59,16.64 39.5,42.55 IC3.4
  Bottom 0.254: BB.CAPE2.T9.13 v20.32,4.06
SCL  (via drill 0.38 pad 0.18)
  Top 0.152: IC1.6 27.43,13.97 27.69,13.72 27.69,11.44 R6.1 28.84,4.96 v27.94,4.06
  Top 0.254: v27.94,4.06 BB.CAPE2.T9.19
  Bottom 0.254: v27.94,4.06 BB.CAPE2.T9.19
SDA  (via drill 0.38 pad 0.18)
  Top 0.152: IC1.5 27.01,13.17 27.17,13.02 R5.1 27.94,9.52 BB.CAPE2.B9.20
  Top 0.254: v27.94,6.1 BB.CAPE2.B9.20
  Bottom 0.254: v27.94,6.1 BB.CAPE2.B9.20
SINK.A  (via drill 0.38 pad 0.18)
  Top 0.152: R12.1 41.77,21.34 v41.66,21.34 41.54,21.34 R11.1 | v22.86,4.06 BB.CAPE2.T9.15
  Bottom 0.152: v41.66,21.34 41.66,14.73 41.15,14.22 39.5,14.22 36.65,11.38 36.65,6.17 35.56,5.08 23.88,5.08 v22.86,4.06 BB.CAPE2.T9.15
SINK.A-BASE
  Top 0.152: T1.1 43.34,23.9 R12.2
SINK.A-TB  (via drill 0.81 pad 0.18)
  other vias: 50.42,21.59 49.4,22.61 48.39,21.59 49.4,20.57 50.42,19.56 50.42,23.62 54.61,19.56 56.64,19.56 55.63,20.57 54.61,21.59
  pour Top: 60.2,19.56 60.2,20.32 59.44,21.08 57.4,21.08 53.59,24.89 50.04,24.89 47.75,22.61 44.96,22.61 44.7,22.35 44.7,20.83 44.96,20.57 47.75,20.57 49.4,18.92 56.9,18.92 57.53,19.56
SINK.B  (via drill 0.38 pad 0.18)
  Top 0.152: R14.1 41.77,13.72 v41.66,13.72 41.54,13.72 R13.1
  Top 0.254: v33.02,4.06 BB.CAPE2.T9.23
  Bottom 0.152: v41.66,13.72 39.62,13.72 37.01,11.1 37.01,6.02 35.69,4.7 33.66,4.7 v33.02,4.06
  Bottom 0.254: v33.02,4.06 BB.CAPE2.T9.23
SINK.B-BASE
  Top 0.254: T2.1 43.34,16.28 R14.2
SINK.B-TB  (via drill 0.81 pad 0.18)
  other vias: 48.39,13.97 54.61,13.97 49.4,14.99 49.4,12.95 50.42,11.94 50.42,16 54.61,16 55.63,14.99 50.42,13.97 56.64,16
  pour Top: 44.96,14.99 47.75,14.99 49.4,16.64 56.9,16.64 57.53,16 60.2,16 60.2,15.24 59.44,14.48 57.4,14.48 53.59,10.67 50.04,10.67 47.75,12.95 44.96,12.95 44.7,13.21 44.7,14.73
SYS.VOUT  (via drill 0.81 pad 0.18)
  other vias: 12.7,4.32 12.7,5.84
  pour Bottom: 11.68,7.75 11.68,2.41 12.06,2.03 13.34,2.03 13.72,2.41 13.72,7.75
  pour Top: 13.34,8.13 12.06,8.13 11.68,7.75 11.68,2.41 12.06,2.03 13.34,2.03 13.72,2.41 13.72,7.75
VCC  (via drill 0.81 pad 0.18)
  other vias: 7.62,4.32 7.62,5.84
  pour Bottom: 8.26,8.13 6.99,8.13 6.48,7.62 6.48,2.54 6.99,2.03 8.26,2.03 8.64,2.41 8.64,7.75
  pour Top (rank 2): 6.48,-0.38 32.26,-0.38 32.26,26.54 39.62,33.91 39.62,35.69 40.01,36.07 40.77,36.07 40.77,36.32 40.01,36.32 39.62,36.7 39.62,37.72 42.55,40.64 42.55,42.8 42.04,43.31 39.75,43.31 38.99,44.07 37.34,44.07 36.7,44.7 28.7,44.7 23.5,39.5 23.5,30.61 10.92,18.03 10.92,11.18 14.22,7.87 14.22,2.29 13.72,1.78 9.02,1.78 8.64,2.16 8.64,9.27 8.26,9.65 6.86,9.65 6.48,9.27
WP  (via drill 0.38 pad 0.18)
  Top 0.152: IC1.7 27.69,14.47 28.19,13.97 28.19,13.6 R4.1 29.98,11.81 v30.35,11.81
  Bottom 0.152: v30.35,11.81 27.56,14.61 6.6,14.61 JMP1.1

## Text on the board
tPlace: GND | B | A2 | RS485 | A | Cape | H | CAN | Comms | L | A | AIN5 | 4-20mA | B | AIN6 | BeagleBone | A | IO48 | Sink | B | IO49 | A0 | A1 | EEPROM / WP | GND